# EAGLE board Module Xbee - Implantation (EAGLE 9.5.2)
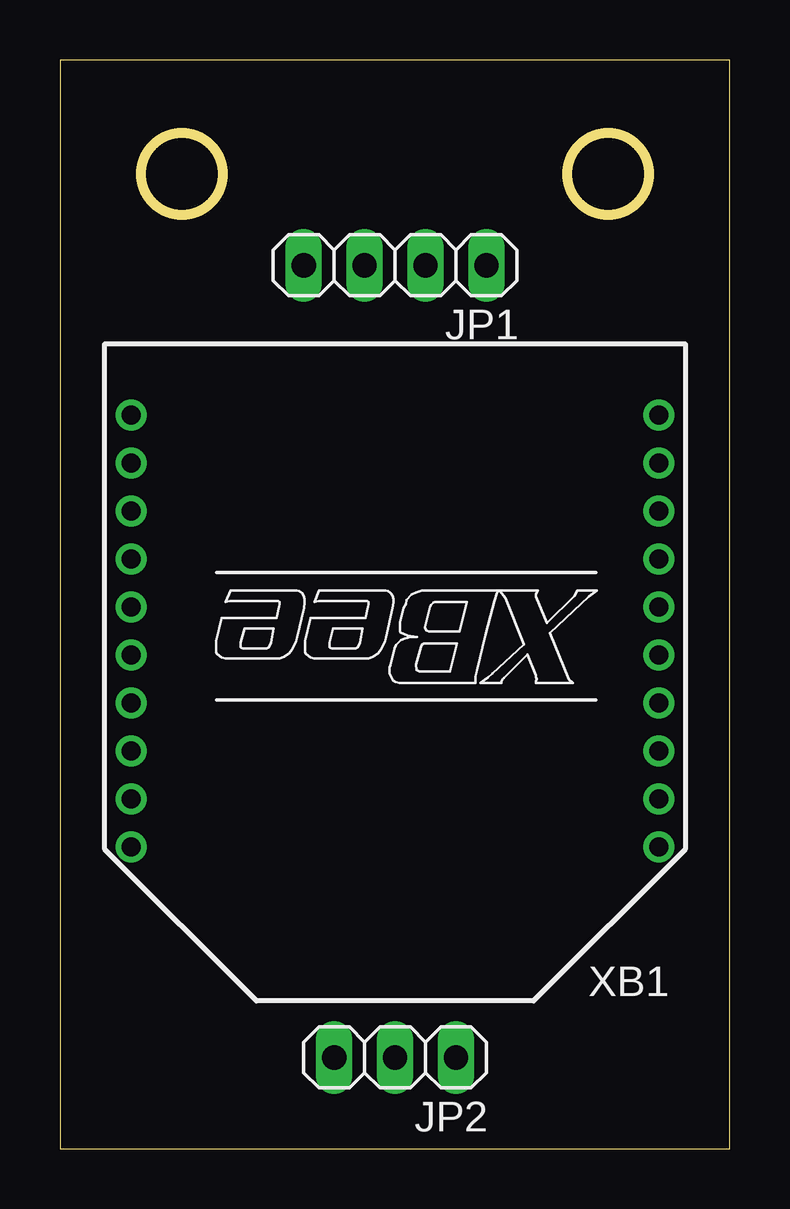
[diagram p0: board, top side]
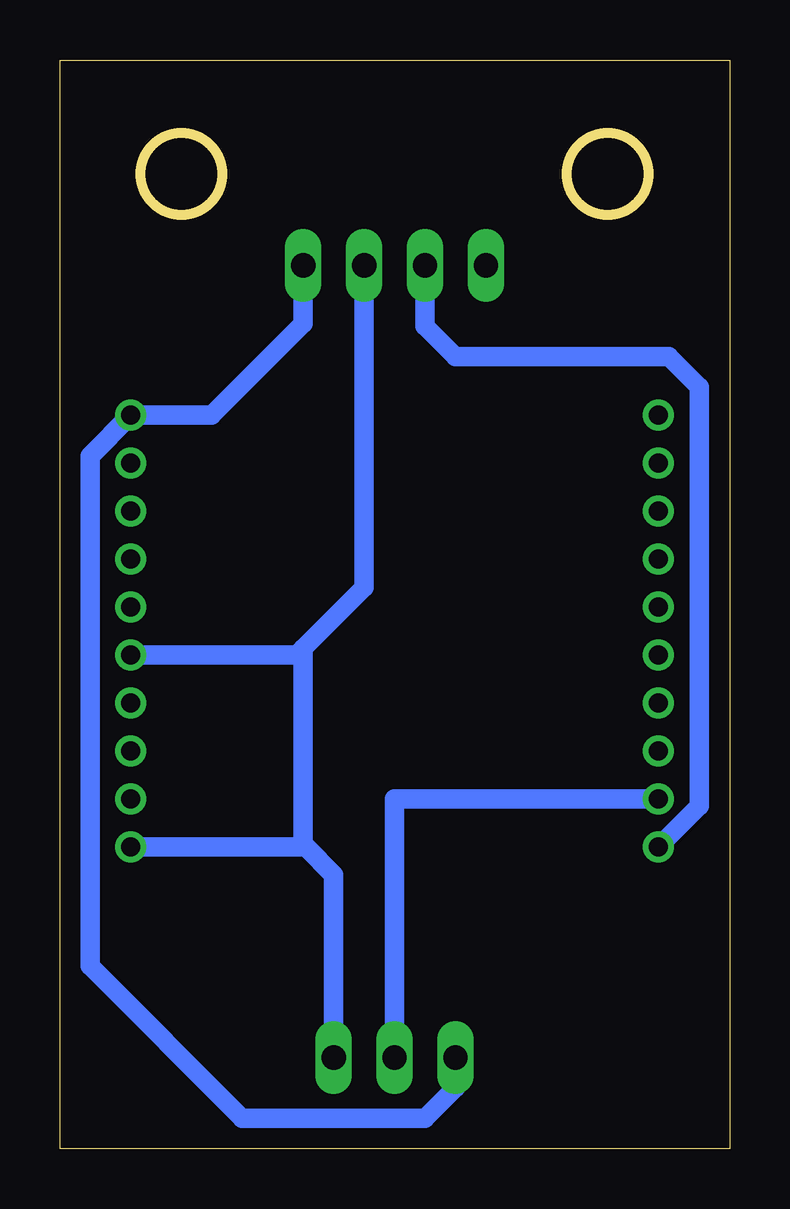
[diagram p1: board, bottom side, seen from below]

Size 27.92 x 45.39 mm. Coordinates in mm from the lower left corner, seen from the top.
Outline: 0,0 27.92,0 27.92,45.39 0,45.39 0,0
Outline: circle at 5.08,40.64 radius 1.7
Outline: circle at 22.86,40.64 radius 1.7
Copper layers (1*16): Top 0.035mm / dielectric 1.5mm / Bottom 0.035mm
Design rules "default": minimum track width 6mil, minimum drill 0.35mm, track to track 6mil, track to pad 6mil, pad to pad 6mil, via to via 6mil, smd to smd 6mil, copper to edge 40mil, drill to drill 6mil, minimum pad ring 10mil, minimum via ring 8mil, stop-mask expansion 4mil, vias tented up to drill 0mil, thermal gap 10mil

## Footprints (pad centres in the part's own frame; a part is rotated, then mirrored left to right if it is on the bottom)
1X04 = drill 1.016 long: 1 -3.81,0; 2 -1.27,0; 3 1.27,0; 4 3.81,0
1X03 = drill 1.016 long: 1 -2.54,0; 2 0,0; 3 2.54,0
XBEE = drill 0.8 pad 1.27: 1 -11,9; 2 -11,7; 3 -11,5; 4 -11,3; 5 -11,1; 6 -11,-1; 7 -11,-3; 8 -11,-5; 9 -11,-7; 10 -11,-9; 11 11,-9; 12 11,-7; 13 11,-5; 14 11,-3; 15 11,-1; 16 11,1; 17 11,3; 18 11,5; 19 11,7; 20 11,9

## Placement (x,y rotation side)
JP1  [1X04]  13.97,36.83 180 top
JP2  [1X03]  13.97,3.81 180 top
XB1  XBEE  [XBEE]  13.97,21.59 180 top

## Library data of the parts
JP1 JP2 = pinhead
XB1 = maxstream; MPN: XBP24-Z7UIT-004; OC_FARNELL: 1751799; OC_NEWARK: 34R5507

## Nets
N$1: JP1.2 JP2.1 XB1.1 XB1.5
N$2: JP1.1 JP2.3 XB1.10
N$3: JP1.3 XB1.20
N$4: JP2.2 XB1.19

## Tracks (layer width: path | path; a pad name or v marks a point on that pad's centre or on a via)
N$1
  Bottom 0.813: JP1.2 15.24,23.4 17.78,20.86 | XB1.1 17.67,12.59 | JP2.1 16.51,11.43 17.67,12.59 | 17.67,12.59 17.78,12.7 17.78,20.32 | XB1.5 18.05,20.59 | 18.05,20.59 17.78,20.32 | 18.05,20.59 17.78,20.86 | 17.78,20.32 17.78,20.86
N$2
  Bottom 0.813: JP1.1 17.78,34.4 21.59,30.59 XB1.10 26.67,28.89 26.67,7.62 20.32,1.27 12.7,1.27 11.43,2.54 JP2.3
N$3
  Bottom 0.813: JP1.3 12.7,34.29 11.43,33.02 2.54,33.02 1.27,31.75 1.27,14.29 XB1.20
N$4
  Bottom 0.813: XB1.19 13.97,14.59 JP2.2